# EAGLE board smd2dip (EAGLE 4.16)
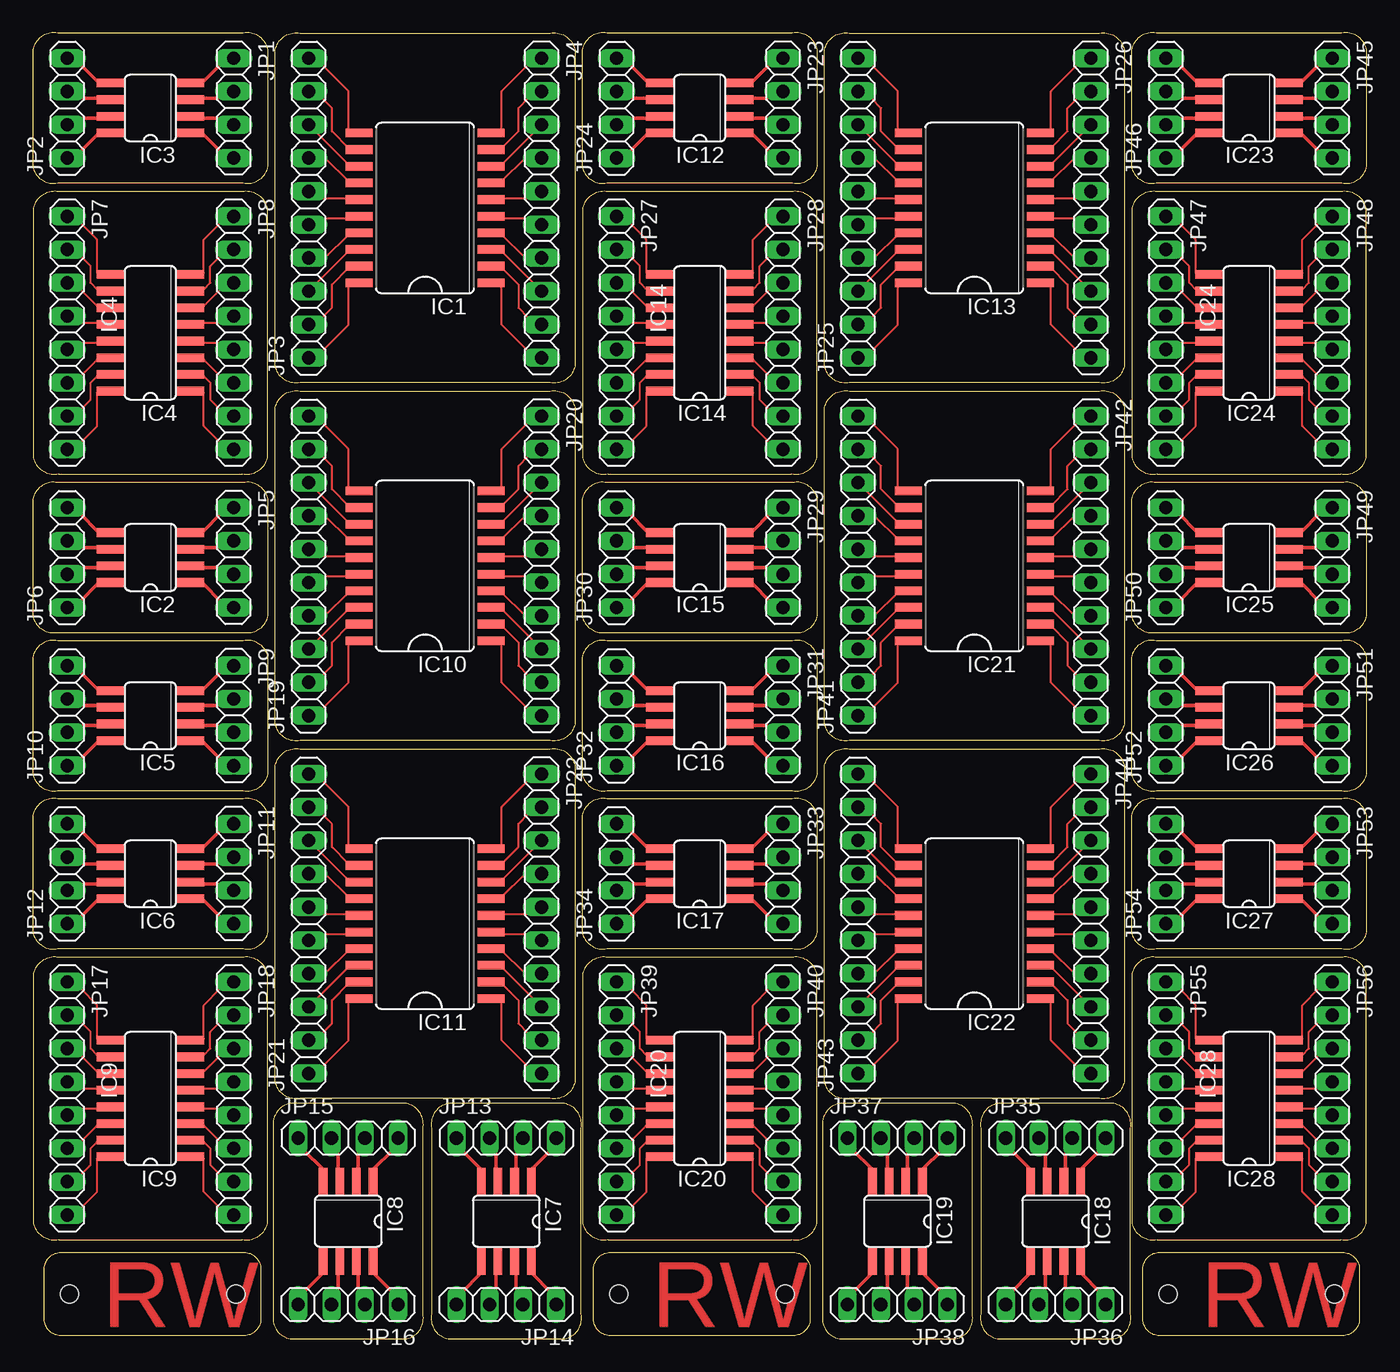
[diagram p0: board, top side]

Size 101.78 x 99.66 mm. Coordinates in mm from the lower left corner, seen from the top.
Outline: 0,89.47 arc90 1.9,88.2 16.05,88.2 arc90 17.96,89.47 17.96,98.35 arc90 16.05,99.62 1.9,99.62 arc90 0,98.35 0,89.47
Outline: 18.5,98.35 arc-90 20.41,99.62 39.46,99.62 arc-90 41.36,98.35 41.36,74.22 arc-90 39.46,72.95 20.41,72.95 arc-90 18.5,74.22 18.5,98.35
Outline: 0.09,86.29 arc-90 1.99,87.56 15.96,87.56 arc-90 17.87,86.29 17.87,67.24 arc-90 15.96,65.97 1.99,65.97 arc-90 0.09,67.24 0.09,86.29
Outline: 0,55.18 arc90 1.9,53.91 16.05,53.91 arc90 17.96,55.18 17.96,64.06 arc90 16.05,65.33 1.9,65.33 arc90 0,64.06 0,55.18
Outline: 0,43.11 arc90 1.9,41.84 16.05,41.84 arc90 17.96,43.11 17.96,51.99 arc90 16.05,53.26 1.9,53.26 arc90 0,51.99 0,43.11
Outline: 0,31.05 arc90 1.9,29.78 16.05,29.78 arc90 17.96,31.05 17.96,39.93 arc90 16.05,41.2 1.9,41.2 arc90 0,39.93 0,31.05
Outline: 40.57,0 arc90 41.84,1.9 41.84,16.05 arc90 40.57,17.96 31.69,17.96 arc90 30.42,16.05 30.42,1.9 arc90 31.69,0 40.57,0
Outline: 28.5,0 arc90 29.77,1.9 29.77,16.05 arc90 28.5,17.96 19.62,17.96 arc90 18.35,16.05 18.35,1.9 arc90 19.62,0 28.5,0
Outline: 0.09,27.87 arc-90 1.99,29.14 15.96,29.14 arc-90 17.87,27.87 17.87,8.82 arc-90 15.96,7.55 1.99,7.55 arc-90 0.09,8.82 0.09,27.87
Outline: 18.5,71.05 arc-90 20.41,72.32 39.46,72.32 arc-90 41.36,71.05 41.36,46.92 arc-90 39.46,45.65 20.41,45.65 arc-90 18.5,46.92 18.5,71.05
Outline: 18.5,43.74 arc-90 20.41,45.01 39.46,45.01 arc-90 41.36,43.74 41.36,19.61 arc-90 39.46,18.34 20.41,18.34 arc-90 18.5,19.61 18.5,43.74
Outline: 41.91,89.47 arc90 43.81,88.2 57.96,88.2 arc90 59.87,89.47 59.87,98.35 arc90 57.96,99.62 43.81,99.62 arc90 41.91,98.35 41.91,89.47
Outline: 60.41,98.35 arc-90 62.32,99.62 81.37,99.62 arc-90 83.27,98.35 83.27,74.22 arc-90 81.37,72.95 62.32,72.95 arc-90 60.41,74.22 60.41,98.35
Outline: 42,86.29 arc-90 43.9,87.56 57.87,87.56 arc-90 59.78,86.29 59.78,67.24 arc-90 57.87,65.97 43.9,65.97 arc-90 42,67.24 42,86.29
Outline: 41.91,55.18 arc90 43.81,53.91 57.96,53.91 arc90 59.87,55.18 59.87,64.06 arc90 57.96,65.33 43.81,65.33 arc90 41.91,64.06 41.91,55.18
Outline: 41.91,43.11 arc90 43.81,41.84 57.96,41.84 arc90 59.87,43.11 59.87,51.99 arc90 57.96,53.26 43.81,53.26 arc90 41.91,51.99 41.91,43.11
Outline: 41.91,31.05 arc90 43.81,29.78 57.96,29.78 arc90 59.87,31.05 59.87,39.93 arc90 57.96,41.2 43.81,41.2 arc90 41.91,39.93 41.91,31.05
Outline: 82.48,0 arc90 83.75,1.9 83.75,16.05 arc90 82.48,17.96 73.6,17.96 arc90 72.33,16.05 72.33,1.9 arc90 73.6,0 82.48,0
Outline: 70.41,0 arc90 71.68,1.9 71.68,16.05 arc90 70.41,17.96 61.53,17.96 arc90 60.26,16.05 60.26,1.9 arc90 61.53,0 70.41,0
Outline: 42,27.87 arc-90 43.9,29.14 57.87,29.14 arc-90 59.78,27.87 59.78,8.82 arc-90 57.87,7.55 43.9,7.55 arc-90 42,8.82 42,27.87
Outline: 60.41,71.05 arc-90 62.32,72.32 81.37,72.32 arc-90 83.27,71.05 83.27,46.92 arc-90 81.37,45.65 62.32,45.65 arc-90 60.41,46.92 60.41,71.05
Outline: 60.41,43.74 arc-90 62.32,45.01 81.37,45.01 arc-90 83.27,43.74 83.27,19.61 arc-90 81.37,18.34 62.32,18.34 arc-90 60.41,19.61 60.41,43.74
Outline: 83.82,89.47 arc90 85.73,88.2 99.87,88.2 arc90 101.78,89.47 101.78,98.35 arc90 99.87,99.62 85.73,99.62 arc90 83.82,98.35 83.82,89.47
Outline: 83.91,86.29 arc-90 85.81,87.56 99.78,87.56 arc-90 101.69,86.29 101.69,67.24 arc-90 99.78,65.97 85.81,65.97 arc-90 83.91,67.24 83.91,86.29
Outline: 83.82,55.18 arc90 85.73,53.91 99.87,53.91 arc90 101.78,55.18 101.78,64.06 arc90 99.87,65.33 85.73,65.33 arc90 83.82,64.06 83.82,55.18
Outline: 83.82,43.11 arc90 85.73,41.84 99.87,41.84 arc90 101.78,43.11 101.78,51.99 arc90 99.87,53.26 85.73,53.26 arc90 83.82,51.99 83.82,43.11
Outline: 83.82,31.05 arc90 85.73,29.78 99.87,29.78 arc90 101.78,31.05 101.78,39.93 arc90 99.87,41.2 85.73,41.2 arc90 83.82,39.93 83.82,31.05
Outline: 83.91,27.87 arc-90 85.81,29.14 99.78,29.14 arc-90 101.69,27.87 101.69,8.82 arc-90 99.78,7.55 85.81,7.55 arc-90 83.91,8.82 83.91,27.87
Outline: 0.88,5.33 arc-90 2.15,6.6 16.12,6.6 arc-90 17.39,5.33 17.39,1.52 arc-90 16.12,0.25 2.15,0.25 arc-90 0.88,1.52 0.88,5.33
Outline: 42.79,5.33 arc-90 44.06,6.6 58.03,6.6 arc-90 59.3,5.33 59.3,1.52 arc-90 58.03,0.25 44.06,0.25 arc-90 42.79,1.52 42.79,5.33
Outline: 84.7,5.33 arc-90 85.97,6.6 99.94,6.6 arc-90 101.21,5.33 101.21,1.52 arc-90 99.94,0.25 85.97,0.25 arc-90 84.7,1.52 84.7,5.33
Copper layers (1*16): Top 0.035mm / dielectric 1.5mm / Bottom 0.035mm
Design rules "PCB-POOL": minimum track width 6mil, minimum drill 12mil, track to track 6mil, track to pad 6mil, pad to pad 6mil, via to via 6mil, smd to smd 6mil, copper to edge 20mil, drill to drill 8mil, minimum pad ring 8mil, minimum via ring 6mil, stop-mask expansion 3mil, vias tented up to drill 0mil, thermal gap 8mil
Holes 1.4 mm at 2.79,3.42 15.49,3.42 44.7,3.42 57.4,3.42 86.61,3.42 99.31,3.42

## Footprints (pad centres in the part's own frame; a part is rotated, then mirrored left to right if it is on the bottom)
SO20W = smd 0.66 x 2.032: 1 -5.715,-5.029; 2 -4.445,-5.029; 3 -3.175,-5.029; 4 -1.905,-5.029; 5 -0.635,-5.029; 6 0.635,-5.029; 7 1.905,-5.029; 8 3.175,-5.029; 9 4.445,-5.029; 10 5.715,-5.029; 11 5.715,5.029; 12 4.445,5.029; 13 3.175,5.029; 14 1.905,5.029; 15 0.635,5.029; 16 -0.635,5.029; 17 -1.905,5.029; 18 -3.175,5.029; 19 -4.445,5.029; 20 -5.715,5.029
SO08 = smd 0.66 x 2.032: 1 -1.905,-3.073; 2 -0.635,-3.073; 3 0.635,-3.073; 4 1.905,-3.073; 5 1.905,3.073; 6 0.635,3.073; 7 -0.635,3.073; 8 -1.905,3.073
SO16 = smd 0.66 x 2.032: 1 -4.445,-3.073; 2 -3.175,-3.073; 3 -1.905,-3.073; 4 -0.635,-3.073; 5 0.635,-3.073; 6 1.905,-3.073; 7 3.175,-3.073; 8 4.445,-3.073; 9 4.445,3.073; 10 3.175,3.073; 11 1.905,3.073; 12 0.635,3.073; 13 -0.635,3.073; 14 -1.905,3.073; 15 -3.175,3.073; 16 -4.445,3.073
1X04 = drill 1.016 long: 1 -3.81,0; 2 -1.27,0; 3 1.27,0; 4 3.81,0
1X10 = drill 1.016 long: 1 -11.43,0; 2 -8.89,0; 3 -6.35,0; 4 -3.81,0; 5 -1.27,0; 6 1.27,0; 7 3.81,0; 8 6.35,0; 9 8.89,0; 10 11.43,0
1X08 = drill 1.016 long: 1 -8.89,0; 2 -6.35,0; 3 -3.81,0; 4 -1.27,0; 5 1.27,0; 6 3.81,0; 7 6.35,0; 8 8.89,0

## Placement (x,y rotation side)
IC1  74HCT573D  [SO20W]  29.93,86.29 90 top
IC2  MAX366CSA  [SO08]  8.98,59.62 90 top
IC3  MAX366CSA  [SO08]  8.98,93.91 90 top
IC4  MAX3232CSE  [SO16]  8.98,76.76 90 top
IC5  MAX366CSA  [SO08]  8.98,47.55 90 top
IC6  MAX366CSA  [SO08]  8.98,35.49 90 top
IC7  MAX366CSA  [SO08]  36.13,8.98 180 top
IC8  MAX366CSA  [SO08]  24.06,8.98 180 top
IC9  MAX3232CSE  [SO16]  8.98,18.34 90 top
IC10  74HCT573D  [SO20W]  29.93,58.98 90 top
IC11  74HCT573D  [SO20W]  29.93,31.68 90 top
IC12  MAX366CSA  [SO08]  50.89,93.91 90 top
IC13  74HCT573D  [SO20W]  71.84,86.29 90 top
IC14  MAX3232CSE  [SO16]  50.89,76.76 90 top
IC15  MAX366CSA  [SO08]  50.89,59.62 90 top
IC16  MAX366CSA  [SO08]  50.89,47.55 90 top
IC17  MAX366CSA  [SO08]  50.89,35.49 90 top
IC18  MAX366CSA  [SO08]  78.04,8.98 180 top
IC19  MAX366CSA  [SO08]  65.97,8.98 180 top
IC20  MAX3232CSE  [SO16]  50.89,18.34 90 top
IC21  74HCT573D  [SO20W]  71.84,58.98 90 top
IC22  74HCT573D  [SO20W]  71.84,31.68 90 top
IC23  MAX366CSA  [SO08]  92.8,93.91 90 top
IC24  MAX3232CSE  [SO16]  92.8,76.76 90 top
IC25  MAX366CSA  [SO08]  92.8,59.62 90 top
IC26  MAX366CSA  [SO08]  92.8,47.55 90 top
IC27  MAX366CSA  [SO08]  92.8,35.49 90 top
IC28  MAX3232CSE  [SO16]  92.8,18.34 90 top
JP1  [1X04]  15.33,93.91 270 top
JP2  [1X04]  2.63,93.91 90 top
JP3  [1X10]  21.04,86.29 90 top
JP4  [1X10]  38.82,86.29 270 top
JP5  [1X04]  15.33,59.62 270 top
JP6  [1X04]  2.63,59.62 90 top
JP7  [1X08]  2.63,76.76 270 top
JP8  [1X08]  15.33,76.76 270 top
JP9  [1X04]  15.33,47.55 270 top
JP10  [1X04]  2.63,47.55 90 top
JP11  [1X04]  15.33,35.49 270 top
JP12  [1X04]  2.63,35.49 90 top
JP13  [1X04]  36.13,15.33 0 top
JP14  [1X04]  36.13,2.63 180 top
JP15  [1X04]  24.06,15.33 0 top
JP16  [1X04]  24.06,2.63 180 top
JP17  [1X08]  2.63,18.34 270 top
JP18  [1X08]  15.33,18.34 270 top
JP19  [1X10]  21.04,58.98 90 top
JP20  [1X10]  38.82,58.98 270 top
JP21  [1X10]  21.04,31.68 90 top
JP22  [1X10]  38.82,31.68 270 top
JP23  [1X04]  57.24,93.91 270 top
JP24  [1X04]  44.54,93.91 90 top
JP25  [1X10]  62.95,86.29 90 top
JP26  [1X10]  80.73,86.29 270 top
JP27  [1X08]  44.54,76.76 270 top
JP28  [1X08]  57.24,76.76 270 top
JP29  [1X04]  57.24,59.62 270 top
JP30  [1X04]  44.54,59.62 90 top
JP31  [1X04]  57.24,47.55 270 top
JP32  [1X04]  44.54,47.55 90 top
JP33  [1X04]  57.24,35.49 270 top
JP34  [1X04]  44.54,35.49 90 top
JP35  [1X04]  78.04,15.33 0 top
JP36  [1X04]  78.04,2.63 180 top
JP37  [1X04]  65.97,15.33 0 top
JP38  [1X04]  65.97,2.63 180 top
JP39  [1X08]  44.54,18.34 270 top
JP40  [1X08]  57.24,18.34 270 top
JP41  [1X10]  62.95,58.98 90 top
JP42  [1X10]  80.73,58.98 270 top
JP43  [1X10]  62.95,31.68 90 top
JP44  [1X10]  80.73,31.68 270 top
JP45  [1X04]  99.15,93.91 270 top
JP46  [1X04]  86.45,93.91 90 top
JP47  [1X08]  86.45,76.76 270 top
JP48  [1X08]  99.15,76.76 270 top
JP49  [1X04]  99.15,59.62 270 top
JP50  [1X04]  86.45,59.62 90 top
JP51  [1X04]  99.15,47.55 270 top
JP52  [1X04]  86.45,47.55 90 top
JP53  [1X04]  99.15,35.49 270 top
JP54  [1X04]  86.45,35.49 90 top
JP55  [1X08]  86.45,18.34 270 top
JP56  [1X08]  99.15,18.34 270 top

## Library data of the parts
IC1 IC10 IC11 IC13 IC21 IC22 = 74xx-eu
IC2-IC9 IC12 IC14-IC20 IC23-IC28 = maxim
JP1-JP56 = pinhead

## Nets
N$1: IC3.1 JP1.4
N$2: IC3.2 JP1.3
N$3: IC3.3 JP1.2
N$4: IC3.4 JP1.1
N$5: IC3.5 JP2.4
N$6: IC3.6 JP2.3
N$7: IC3.7 JP2.2
N$8: IC3.8 JP2.1
N$9: IC4.1 JP8.8
N$10: IC4.3 JP8.6
N$11: IC4.2 JP8.7
N$12: IC4.4 JP8.5
N$13: IC4.5 JP8.4
N$14: IC4.6 JP8.3
N$15: IC4.7 JP8.2
N$16: IC4.8 JP8.1
N$17: IC4.16 JP7.8
N$18: IC4.15 JP7.7
N$19: IC4.14 JP7.6
N$20: IC4.13 JP7.5
N$21: IC4.12 JP7.4
N$22: IC4.11 JP7.3
N$23: IC4.10 JP7.2
N$24: IC4.9 JP7.1
N$25: IC1.2 JP4.9
N$26: IC1.3 JP4.8
N$27: IC1.4 JP4.7
N$28: IC1.5 JP4.6
N$29: IC1.6 JP4.5
N$30: IC1.7 JP4.4
N$31: IC1.8 JP4.3
N$32: IC1.9 JP4.2
N$33: IC1.10 JP4.1
N$34: IC1.1 JP4.10
N$35: IC1.11 JP3.10
N$36: IC1.12 JP3.9
N$37: IC1.13 JP3.8
N$38: IC1.14 JP3.7
N$39: IC1.15 JP3.6
N$40: IC1.16 JP3.5
N$41: IC1.17 JP3.4
N$42: IC1.18 JP3.3
N$43: IC1.19 JP3.2
N$44: IC1.20 JP3.1
N$45: IC2.1 JP5.4
N$46: IC2.2 JP5.3
N$47: IC2.3 JP5.2
N$48: IC2.4 JP5.1
N$49: IC2.5 JP6.4
N$50: IC2.6 JP6.3
N$51: IC2.7 JP6.2
N$52: IC2.8 JP6.1
N$53: IC5.1 JP9.4
N$54: IC5.2 JP9.3
N$55: IC5.3 JP9.2
N$56: IC5.4 JP9.1
N$57: IC5.5 JP10.4
N$58: IC5.6 JP10.3
N$59: IC5.7 JP10.2
N$60: IC5.8 JP10.1
N$61: IC6.1 JP11.4
N$62: IC6.2 JP11.3
N$63: IC6.3 JP11.2
N$64: IC6.4 JP11.1
N$65: IC6.5 JP12.4
N$66: IC6.6 JP12.3
N$67: IC6.7 JP12.2
N$68: IC6.8 JP12.1
N$69: IC7.1 JP13.4
N$70: IC7.2 JP13.3
N$71: IC7.3 JP13.2
N$72: IC7.4 JP13.1
N$73: IC7.5 JP14.4
N$74: IC7.6 JP14.3
N$75: IC7.7 JP14.2
N$76: IC7.8 JP14.1
N$77: IC8.1 JP15.4
N$78: IC8.2 JP15.3
N$79: IC8.3 JP15.2
N$80: IC8.4 JP15.1
N$81: IC8.5 JP16.4
N$82: IC8.6 JP16.3
N$83: IC8.7 JP16.2
N$84: IC8.8 JP16.1
N$85: IC9.1 JP18.8
N$86: IC9.3 JP18.6
N$87: IC9.2 JP18.7
N$88: IC9.4 JP18.5
N$89: IC9.5 JP18.4
N$90: IC9.6 JP18.3
N$91: IC9.7 JP18.2
N$92: IC9.8 JP18.1
N$93: IC9.16 JP17.8
N$94: IC9.15 JP17.7
N$95: IC9.14 JP17.6
N$96: IC9.13 JP17.5
N$97: IC9.12 JP17.4
N$98: IC9.11 JP17.3
N$99: IC9.10 JP17.2
N$100: IC9.9 JP17.1
N$101: IC10.2 JP20.9
N$102: IC10.3 JP20.8
N$103: IC10.4 JP20.7
N$104: IC10.5 JP20.6
N$105: IC10.6 JP20.5
N$106: IC10.7 JP20.4
N$107: IC10.8 JP20.3
N$108: IC10.9 JP20.2
N$109: IC10.10 JP20.1
N$110: IC10.1 JP20.10
N$111: IC10.11 JP19.10
N$112: IC10.12 JP19.9
N$113: IC10.13 JP19.8
N$114: IC10.14 JP19.7
N$115: IC10.15 JP19.6
N$116: IC10.16 JP19.5
N$117: IC10.17 JP19.4
N$118: IC10.18 JP19.3
N$119: IC10.19 JP19.2
N$120: IC10.20 JP19.1
N$121: IC11.2 JP22.9
N$122: IC11.3 JP22.8
N$123: IC11.4 JP22.7
N$124: IC11.5 JP22.6
N$125: IC11.6 JP22.5
N$126: IC11.7 JP22.4
N$127: IC11.8 JP22.3
N$128: IC11.9 JP22.2
N$129: IC11.10 JP22.1
N$130: IC11.1 JP22.10
N$131: IC11.11 JP21.10
N$132: IC11.12 JP21.9
N$133: IC11.13 JP21.8
N$134: IC11.14 JP21.7
N$135: IC11.15 JP21.6
N$136: IC11.16 JP21.5
N$137: IC11.17 JP21.4
N$138: IC11.18 JP21.3
N$139: IC11.19 JP21.2
N$140: IC11.20 JP21.1
N$141: IC12.1 JP23.4
N$142: IC12.2 JP23.3
N$143: IC12.3 JP23.2
N$144: IC12.4 JP23.1
N$145: IC12.5 JP24.4
N$146: IC12.6 JP24.3
N$147: IC12.7 JP24.2
N$148: IC12.8 JP24.1
N$149: IC14.1 JP28.8
N$150: IC14.3 JP28.6
N$151: IC14.2 JP28.7
N$152: IC14.4 JP28.5
N$153: IC14.5 JP28.4
N$154: IC14.6 JP28.3
N$155: IC14.7 JP28.2
N$156: IC14.8 JP28.1
N$157: IC14.16 JP27.8
N$158: IC14.15 JP27.7
N$159: IC14.14 JP27.6
N$160: IC14.13 JP27.5
N$161: IC14.12 JP27.4
N$162: IC14.11 JP27.3
N$163: IC14.10 JP27.2
N$164: IC14.9 JP27.1
N$165: IC13.2 JP26.9
N$166: IC13.3 JP26.8
N$167: IC13.4 JP26.7
N$168: IC13.5 JP26.6
N$169: IC13.6 JP26.5
N$170: IC13.7 JP26.4
N$171: IC13.8 JP26.3
N$172: IC13.9 JP26.2
N$173: IC13.10 JP26.1
N$174: IC13.1 JP26.10
N$175: IC13.11 JP25.10
N$176: IC13.12 JP25.9
N$177: IC13.13 JP25.8
N$178: IC13.14 JP25.7
N$179: IC13.15 JP25.6
N$180: IC13.16 JP25.5
N$181: IC13.17 JP25.4
N$182: IC13.18 JP25.3
N$183: IC13.19 JP25.2
N$184: IC13.20 JP25.1
N$185: IC15.1 JP29.4
N$186: IC15.2 JP29.3
N$187: IC15.3 JP29.2
N$188: IC15.4 JP29.1
N$189: IC15.5 JP30.4
N$190: IC15.6 JP30.3
N$191: IC15.7 JP30.2
N$192: IC15.8 JP30.1
N$193: IC16.1 JP31.4
N$194: IC16.2 JP31.3
N$195: IC16.3 JP31.2
N$196: IC16.4 JP31.1
N$197: IC16.5 JP32.4
N$198: IC16.6 JP32.3
N$199: IC16.7 JP32.2
N$200: IC16.8 JP32.1
N$201: IC17.1 JP33.4
N$202: IC17.2 JP33.3
N$203: IC17.3 JP33.2
N$204: IC17.4 JP33.1
N$205: IC17.5 JP34.4
N$206: IC17.6 JP34.3
N$207: IC17.7 JP34.2
N$208: IC17.8 JP34.1
N$209: IC18.1 JP35.4
N$210: IC18.2 JP35.3
N$211: IC18.3 JP35.2
N$212: IC18.4 JP35.1
N$213: IC18.5 JP36.4
N$214: IC18.6 JP36.3
N$215: IC18.7 JP36.2
N$216: IC18.8 JP36.1
N$217: IC19.1 JP37.4
N$218: IC19.2 JP37.3
N$219: IC19.3 JP37.2
N$220: IC19.4 JP37.1
N$221: IC19.5 JP38.4
N$222: IC19.6 JP38.3
N$223: IC19.7 JP38.2
N$224: IC19.8 JP38.1
N$225: IC20.1 JP40.8
N$226: IC20.3 JP40.6
N$227: IC20.2 JP40.7
N$228: IC20.4 JP40.5
N$229: IC20.5 JP40.4
N$230: IC20.6 JP40.3
N$231: IC20.7 JP40.2
N$232: IC20.8 JP40.1
N$233: IC20.16 JP39.8
N$234: IC20.15 JP39.7
N$235: IC20.14 JP39.6
N$236: IC20.13 JP39.5
N$237: IC20.12 JP39.4
N$238: IC20.11 JP39.3
N$239: IC20.10 JP39.2
N$240: IC20.9 JP39.1
N$241: IC21.2 JP42.9
N$242: IC21.3 JP42.8
N$243: IC21.4 JP42.7
N$244: IC21.5 JP42.6
N$245: IC21.6 JP42.5
N$246: IC21.7 JP42.4
N$247: IC21.8 JP42.3
N$248: IC21.9 JP42.2
N$249: IC21.10 JP42.1
N$250: IC21.1 JP42.10
N$251: IC21.11 JP41.10
N$252: IC21.12 JP41.9
N$253: IC21.13 JP41.8
N$254: IC21.14 JP41.7
N$255: IC21.15 JP41.6
N$256: IC21.16 JP41.5
N$257: IC21.17 JP41.4
N$258: IC21.18 JP41.3
N$259: IC21.19 JP41.2
N$260: IC21.20 JP41.1
N$261: IC22.2 JP44.9
N$262: IC22.3 JP44.8
N$263: IC22.4 JP44.7
N$264: IC22.5 JP44.6
N$265: IC22.6 JP44.5
N$266: IC22.7 JP44.4
N$267: IC22.8 JP44.3
N$268: IC22.9 JP44.2
N$269: IC22.10 JP44.1
N$270: IC22.1 JP44.10
N$271: IC22.11 JP43.10
N$272: IC22.12 JP43.9
N$273: IC22.13 JP43.8
N$274: IC22.14 JP43.7
N$275: IC22.15 JP43.6
N$276: IC22.16 JP43.5
N$277: IC22.17 JP43.4
N$278: IC22.18 JP43.3
N$279: IC22.19 JP43.2
N$280: IC22.20 JP43.1
N$281: IC23.1 JP45.4
N$282: IC23.2 JP45.3
N$283: IC23.3 JP45.2
N$284: IC23.4 JP45.1
N$285: IC23.5 JP46.4
N$286: IC23.6 JP46.3
N$287: IC23.7 JP46.2
N$288: IC23.8 JP46.1
N$289: IC24.1 JP48.8
N$290: IC24.3 JP48.6
N$291: IC24.2 JP48.7
N$292: IC24.4 JP48.5
N$293: IC24.5 JP48.4
N$294: IC24.6 JP48.3
N$295: IC24.7 JP48.2
N$296: IC24.8 JP48.1
N$297: IC24.16 JP47.8
N$298: IC24.15 JP47.7
N$299: IC24.14 JP47.6
N$300: IC24.13 JP47.5
N$301: IC24.12 JP47.4
N$302: IC24.11 JP47.3
N$303: IC24.10 JP47.2
N$304: IC24.9 JP47.1
N$305: IC25.1 JP49.4
N$306: IC25.2 JP49.3
N$307: IC25.3 JP49.2
N$308: IC25.4 JP49.1
N$309: IC25.5 JP50.4
N$310: IC25.6 JP50.3
N$311: IC25.7 JP50.2
N$312: IC25.8 JP50.1
N$313: IC26.1 JP51.4
N$314: IC26.2 JP51.3
N$315: IC26.3 JP51.2
N$316: IC26.4 JP51.1
N$317: IC26.5 JP52.4
N$318: IC26.6 JP52.3
N$319: IC26.7 JP52.2
N$320: IC26.8 JP52.1
N$321: IC27.1 JP53.4
N$322: IC27.2 JP53.3
N$323: IC27.3 JP53.2
N$324: IC27.4 JP53.1
N$325: IC27.5 JP54.4
N$326: IC27.6 JP54.3
N$327: IC27.7 JP54.2
N$328: IC27.8 JP54.1
N$329: IC28.1 JP56.8
N$330: IC28.3 JP56.6
N$331: IC28.2 JP56.7
N$332: IC28.4 JP56.5
N$333: IC28.5 JP56.4
N$334: IC28.6 JP56.3
N$335: IC28.7 JP56.2
N$336: IC28.8 JP56.1
N$337: IC28.16 JP55.8
N$338: IC28.15 JP55.7
N$339: IC28.14 JP55.6
N$340: IC28.13 JP55.5
N$341: IC28.12 JP55.4
N$342: IC28.11 JP55.3
N$343: IC28.10 JP55.2
N$344: IC28.9 JP55.1

## Tracks (layer width: path | path; a pad name or v marks a point on that pad's centre or on a via)
N$1
  Top 0.254: IC3.1 13.04,91.88 14.31,90.61 JP1.4
N$2
  Top 0.254: IC3.2 13.04,93.15 14.06,93.15 JP1.3
N$3
  Top 0.254: IC3.3 13.04,94.67 14.06,94.67 JP1.2
N$4
  Top 0.254: IC3.4 13.04,95.94 14.31,97.21 JP1.1
N$5
  Top 0.254: IC3.5 4.92,95.94 3.64,97.21 JP2.4
N$6
  Top 0.254: IC3.6 4.92,94.67 3.9,94.67 JP2.3
N$7
  Top 0.254: IC3.7 4.92,93.15 3.9,93.15 JP2.2
N$8
  Top 0.254: IC3.8 4.92,91.88 3.64,90.61 JP2.1
N$9
  Top 0.152: IC4.1 13.04,72.19 13.04,69.65 14.31,68.38 JP8.8
N$10
  Top 0.152: IC4.3 13.04,74.73 14.31,73.46 JP8.6
N$11
  Top 0.152: IC4.2 13.04,73.46 13.55,72.95 13.55,71.68 14.31,70.92 JP8.7
N$12
  Top 0.152: IC4.4 13.04,76 14.31,76 JP8.5
N$13
  Top 0.152: IC4.5 13.04,77.53 14.31,77.53 JP8.4
N$14
  Top 0.152: IC4.6 13.04,78.8 14.31,80.07 JP8.3
N$15
  Top 0.152: IC4.7 13.04,80.07 13.55,80.57 13.55,81.84 14.31,82.61 JP8.2
N$16
  Top 0.152: IC4.8 13.04,81.34 13.04,83.88 14.31,85.15 JP8.1
N$17
  Top 0.152: IC4.16 4.92,72.19 4.92,69.65 3.64,68.38 JP7.8
N$18
  Top 0.152: IC4.15 4.92,73.46 4.41,72.95 4.41,71.68 3.64,70.92 JP7.7
N$19
  Top 0.152: IC4.14 4.92,74.73 3.64,73.46 JP7.6
N$20
  Top 0.152: IC4.13 4.92,76 3.64,76 JP7.5
N$21
  Top 0.152: IC4.12 4.92,77.53 3.64,77.53 JP7.4
N$22
  Top 0.152: IC4.11 4.92,78.8 3.64,80.07 JP7.3
N$23
  Top 0.152: IC4.10 4.92,80.07 4.41,80.57 4.41,81.84 3.64,82.61 JP7.2
N$24
  Top 0.152: IC4.9 4.92,81.34 4.92,83.88 3.64,85.15 JP7.1
N$25
  Top 0.152: IC1.2 35.78,81.72 37.05,80.45 37.05,78.67 37.81,77.91 JP4.9
N$26
  Top 0.152: IC1.3 35.78,82.99 JP4.8
N$27
  Top 0.152: IC1.4 35.78,84.26 37.55,82.48 JP4.7
N$28
  Top 0.152: IC1.5 35.78,85.53 37.81,85.53 JP4.6
N$29
  Top 0.152: IC1.6 35.78,87.05 37.81,87.05 JP4.5
N$30
  Top 0.152: IC1.7 35.78,88.32 37.55,90.1 JP4.4
N$31
  Top 0.152: IC1.8 35.78,89.59 JP4.3
N$32
  Top 0.152: IC1.9 35.78,90.86 37.05,92.13 37.05,93.91 37.81,94.67 JP4.2
N$33
  Top 0.152: IC1.10 35.78,92.13 35.78,95.18 37.81,97.21 JP4.1
N$34
  Top 0.152: IC1.1 35.78,80.45 35.78,77.4 37.81,75.37 JP4.10
N$35
  Top 0.152: IC1.11 24.09,92.13 24.09,95.18 22.06,97.21 JP3.10
N$36
  Top 0.152: IC1.12 24.09,90.86 22.82,92.13 22.82,93.91 22.06,94.67 JP3.9
N$37
  Top 0.152: IC1.13 24.09,89.59 JP3.8
N$38
  Top 0.152: IC1.14 24.09,88.32 22.31,90.1 JP3.7
N$39
  Top 0.152: IC1.15 24.09,87.05 22.06,87.05 JP3.6
N$40
  Top 0.152: IC1.16 24.09,85.53 22.06,85.53 JP3.5
N$41
  Top 0.152: IC1.17 24.09,84.26 22.31,82.48 JP3.4
N$42
  Top 0.152: IC1.18 24.09,82.99 JP3.3
N$43
  Top 0.152: IC1.19 24.09,81.72 22.82,80.45 22.82,78.67 22.06,77.91 JP3.2
N$44
  Top 0.152: IC1.20 24.09,80.45 24.09,77.4 22.06,75.37 JP3.1
N$45
  Top 0.254: IC2.1 13.04,57.59 14.31,56.32 JP5.4
N$46
  Top 0.254: IC2.2 13.04,58.86 14.06,58.86 JP5.3
N$47
  Top 0.254: IC2.3 13.04,60.38 14.06,60.38 JP5.2
N$48
  Top 0.254: IC2.4 13.04,61.65 14.31,62.92 JP5.1
N$49
  Top 0.254: IC2.5 4.92,61.65 3.64,62.92 JP6.4
N$50
  Top 0.254: IC2.6 4.92,60.38 3.9,60.38 JP6.3
N$51
  Top 0.254: IC2.7 4.92,58.86 3.9,58.86 JP6.2
N$52
  Top 0.254: IC2.8 4.92,57.59 3.64,56.32 JP6.1
N$53
  Top 0.254: IC5.1 13.04,45.52 14.31,44.25 JP9.4
N$54
  Top 0.254: IC5.2 13.04,46.79 14.06,46.79 JP9.3
N$55
  Top 0.254: IC5.3 13.04,48.32 14.06,48.32 JP9.2
N$56
  Top 0.254: IC5.4 13.04,49.59 14.31,50.86 JP9.1
N$57
  Top 0.254: IC5.5 4.92,49.59 3.64,50.86 JP10.4
N$58
  Top 0.254: IC5.6 4.92,48.32 3.9,48.32 JP10.3
N$59
  Top 0.254: IC5.7 4.92,46.79 3.9,46.79 JP10.2
N$60
  Top 0.254: IC5.8 4.92,45.52 3.64,44.25 JP10.1
N$61
  Top 0.254: IC6.1 13.04,33.46 14.31,32.19 JP11.4
N$62
  Top 0.254: IC6.2 13.04,34.73 14.06,34.73 JP11.3
N$63
  Top 0.254: IC6.3 13.04,36.25 14.06,36.25 JP11.2
N$64
  Top 0.254: IC6.4 13.04,37.52 14.31,38.79 JP11.1
N$65
  Top 0.254: IC6.5 4.92,37.52 3.64,38.79 JP12.4
N$66
  Top 0.254: IC6.6 4.92,36.25 3.9,36.25 JP12.3
N$67
  Top 0.254: IC6.7 4.92,34.73 3.9,34.73 JP12.2
N$68
  Top 0.254: IC6.8 4.92,33.46 3.64,32.19 JP12.1
N$69
  Top 0.254: IC7.1 38.16,13.04 39.43,14.31 JP13.4
N$70
  Top 0.254: IC7.2 36.89,13.04 36.89,14.06 JP13.3
N$71
  Top 0.254: IC7.3 35.37,13.04 35.37,14.06 JP13.2
N$72
  Top 0.254: IC7.4 34.1,13.04 32.83,14.31 JP13.1
N$73
  Top 0.254: IC7.5 34.1,4.92 32.83,3.65 JP14.4
N$74
  Top 0.254: IC7.6 35.37,4.92 35.37,3.9 JP14.3
N$75
  Top 0.254: IC7.7 36.89,4.92 36.89,3.9 JP14.2
N$76
  Top 0.254: IC7.8 38.16,4.92 39.43,3.65 JP14.1
N$77
  Top 0.254: IC8.1 26.1,13.04 27.37,14.31 JP15.4
N$78
  Top 0.254: IC8.2 24.83,13.04 24.83,14.06 JP15.3
N$79
  Top 0.254: IC8.3 23.3,13.04 23.3,14.06 JP15.2
N$80
  Top 0.254: IC8.4 22.03,13.04 20.76,14.31 JP15.1
N$81
  Top 0.254: IC8.5 22.03,4.92 20.76,3.65 JP16.4
N$82
  Top 0.254: IC8.6 23.3,4.92 23.3,3.9 JP16.3
N$83
  Top 0.254: IC8.7 24.83,4.92 24.83,3.9 JP16.2
N$84
  Top 0.254: IC8.8 26.1,4.92 27.37,3.65 JP16.1
N$85
  Top 0.152: IC9.1 13.04,13.77 13.04,11.23 14.31,9.96 JP18.8
N$86
  Top 0.152: IC9.3 13.04,16.31 14.31,15.04 JP18.6
N$87
  Top 0.152: IC9.2 13.04,15.04 13.55,14.53 13.55,13.26 14.31,12.5 JP18.7
N$88
  Top 0.152: IC9.4 13.04,17.58 14.31,17.58 JP18.5
N$89
  Top 0.152: IC9.5 13.04,19.11 14.31,19.11 JP18.4
N$90
  Top 0.152: IC9.6 13.04,20.38 14.31,21.65 JP18.3
N$91
  Top 0.152: IC9.7 13.04,21.65 13.55,22.15 13.55,23.42 14.31,24.19 JP18.2
N$92
  Top 0.152: IC9.8 13.04,22.92 13.04,25.46 14.31,26.73 JP18.1
N$93
  Top 0.152: IC9.16 4.92,13.77 4.92,11.23 3.64,9.96 JP17.8
N$94
  Top 0.152: IC9.15 4.92,15.04 4.41,14.53 4.41,13.26 3.64,12.5 JP17.7
N$95
  Top 0.152: IC9.14 4.92,16.31 3.64,15.04 JP17.6
N$96
  Top 0.152: IC9.13 4.92,17.58 3.64,17.58 JP17.5
N$97
  Top 0.152: IC9.12 4.92,19.11 3.64,19.11 JP17.4
N$98
  Top 0.152: IC9.11 4.92,20.38 3.64,21.65 JP17.3
N$99
  Top 0.152: IC9.10 4.92,21.65 4.41,22.15 4.41,23.42 3.64,24.19 JP17.2
N$100
  Top 0.152: IC9.9 4.92,22.92 4.92,25.46 3.64,26.73 JP17.1
N$101
  Top 0.152: IC10.2 35.78,54.41 37.05,53.14 37.05,51.36 37.81,50.6 JP20.9
N$102
  Top 0.152: IC10.3 35.78,55.68 JP20.8
N$103
  Top 0.152: IC10.4 35.78,56.95 37.55,55.17 JP20.7
N$104
  Top 0.152: IC10.5 35.78,58.22 37.81,58.22 JP20.6
N$105
  Top 0.152: IC10.6 35.78,59.75 37.81,59.75 JP20.5
N$106
  Top 0.152: IC10.7 35.78,61.02 37.55,62.79 JP20.4
N$107
  Top 0.152: IC10.8 35.78,62.29 JP20.3
N$108
  Top 0.152: IC10.9 35.78,63.56 37.05,64.83 37.05,66.6 37.81,67.37 JP20.2
N$109
  Top 0.152: IC10.10 35.78,64.83 35.78,67.87 37.81,69.91 JP20.1
N$110
  Top 0.152: IC10.1 35.78,53.14 35.78,50.09 37.81,48.06 JP20.10
N$111
  Top 0.152: IC10.11 24.09,64.83 24.09,67.87 22.06,69.91 JP19.10
N$112
  Top 0.152: IC10.12 24.09,63.56 22.82,64.83 22.82,66.6 22.06,67.37 JP19.9
N$113
  Top 0.152: IC10.13 24.09,62.29 JP19.8
N$114
  Top 0.152: IC10.14 24.09,61.02 22.31,62.79 JP19.7
N$115
  Top 0.152: IC10.15 24.09,59.75 22.06,59.75 JP19.6
N$116
  Top 0.152: IC10.16 24.09,58.22 22.06,58.22 JP19.5
N$117
  Top 0.152: IC10.17 24.09,56.95 22.31,55.17 JP19.4
N$118
  Top 0.152: IC10.18 24.09,55.68 JP19.3
N$119
  Top 0.152: IC10.19 24.09,54.41 22.82,53.14 22.82,51.36 22.06,50.6 JP19.2
N$120
  Top 0.152: IC10.20 24.09,53.14 24.09,50.09 22.06,48.06 JP19.1
N$121
  Top 0.152: IC11.2 35.78,27.11 37.05,25.84 37.05,24.06 37.81,23.3 JP22.9
N$122
  Top 0.152: IC11.3 35.78,28.38 JP22.8
N$123
  Top 0.152: IC11.4 35.78,29.65 37.55,27.87 JP22.7
N$124
  Top 0.152: IC11.5 35.78,30.92 37.81,30.92 JP22.6
N$125
  Top 0.152: IC11.6 35.78,32.44 37.81,32.44 JP22.5
N$126
  Top 0.152: IC11.7 35.78,33.71 37.55,35.49 JP22.4
N$127
  Top 0.152: IC11.8 35.78,34.98 JP22.3
N$128
  Top 0.152: IC11.9 35.78,36.25 37.05,37.52 37.05,39.3 37.81,40.06 JP22.2
N$129
  Top 0.152: IC11.10 35.78,37.52 35.78,40.57 37.81,42.6 JP22.1
N$130
  Top 0.152: IC11.1 35.78,25.84 35.78,22.79 37.81,20.76 JP22.10
N$131
  Top 0.152: IC11.11 24.09,37.52 24.09,40.57 22.06,42.6 JP21.10
N$132
  Top 0.152: IC11.12 24.09,36.25 22.82,37.52 22.82,39.3 22.06,40.06 JP21.9
N$133
  Top 0.152: IC11.13 24.09,34.98 JP21.8
N$134
  Top 0.152: IC11.14 24.09,33.71 22.31,35.49 JP21.7
N$135
  Top 0.152: IC11.15 24.09,32.44 22.06,32.44 JP21.6
N$136
  Top 0.152: IC11.16 24.09,30.92 22.06,30.92 JP21.5
N$137
  Top 0.152: IC11.17 24.09,29.65 22.31,27.87 JP21.4
N$138
  Top 0.152: IC11.18 24.09,28.38 JP21.3
N$139
  Top 0.152: IC11.19 24.09,27.11 22.82,25.84 22.82,24.06 22.06,23.3 JP21.2
N$140
  Top 0.152: IC11.20 24.09,25.84 24.09,22.79 22.06,20.76 JP21.1
N$141
  Top 0.254: IC12.1 54.95,91.88 56.22,90.61 JP23.4
N$142
  Top 0.254: IC12.2 54.95,93.15 55.97,93.15 JP23.3
N$143
  Top 0.254: IC12.3 54.95,94.67 55.97,94.67 JP23.2
N$144
  Top 0.254: IC12.4 54.95,95.94 56.22,97.21 JP23.1
N$145
  Top 0.254: IC12.5 46.82,95.94 45.55,97.21 JP24.4
N$146
  Top 0.254: IC12.6 46.82,94.67 45.81,94.67 JP24.3
N$147
  Top 0.254: IC12.7 46.82,93.15 45.81,93.15 JP24.2
N$148
  Top 0.254: IC12.8 46.82,91.88 45.55,90.61 JP24.1
N$149
  Top 0.152: IC14.1 54.95,72.19 54.95,69.65 56.22,68.38 JP28.8
N$150
  Top 0.152: IC14.3 54.95,74.73 56.22,73.46 JP28.6
N$151
  Top 0.152: IC14.2 54.95,73.46 55.46,72.95 55.46,71.68 56.22,70.92 JP28.7
N$152
  Top 0.152: IC14.4 54.95,76 56.22,76 JP28.5
N$153
  Top 0.152: IC14.5 54.95,77.53 56.22,77.53 JP28.4
N$154
  Top 0.152: IC14.6 54.95,78.8 56.22,80.07 JP28.3
N$155
  Top 0.152: IC14.7 54.95,80.07 55.46,80.57 55.46,81.84 56.22,82.61 JP28.2
N$156
  Top 0.152: IC14.8 54.95,81.34 54.95,83.88 56.22,85.15 JP28.1
N$157
  Top 0.152: IC14.16 46.82,72.19 46.82,69.65 45.55,68.38 JP27.8
N$158
  Top 0.152: IC14.15 46.82,73.46 46.32,72.95 46.32,71.68 45.55,70.92 JP27.7
N$159
  Top 0.152: IC14.14 46.82,74.73 45.55,73.46 JP27.6
N$160
  Top 0.152: IC14.13 46.82,76 45.55,76 JP27.5
N$161
  Top 0.152: IC14.12 46.82,77.53 45.55,77.53 JP27.4
N$162
  Top 0.152: IC14.11 46.82,78.8 45.55,80.07 JP27.3
N$163
  Top 0.152: IC14.10 46.82,80.07 46.32,80.57 46.32,81.84 45.55,82.61 JP27.2
N$164
  Top 0.152: IC14.9 46.82,81.34 46.82,83.88 45.55,85.15 JP27.1
N$165
  Top 0.152: IC13.2 77.69,81.72 78.96,80.45 78.96,78.67 79.72,77.91 JP26.9
N$166
  Top 0.152: IC13.3 77.69,82.99 JP26.8
N$167
  Top 0.152: IC13.4 77.69,84.26 79.46,82.48 JP26.7
N$168
  Top 0.152: IC13.5 77.69,85.53 79.72,85.53 JP26.6
N$169
  Top 0.152: IC13.6 77.69,87.05 79.72,87.05 JP26.5
N$170
  Top 0.152: IC13.7 77.69,88.32 79.46,90.1 JP26.4
N$171
  Top 0.152: IC13.8 77.69,89.59 JP26.3
N$172
  Top 0.152: IC13.9 77.69,90.86 78.96,92.13 78.96,93.91 79.72,94.67 JP26.2
N$173
  Top 0.152: IC13.10 77.69,92.13 77.69,95.18 79.72,97.21 JP26.1
N$174
  Top 0.152: IC13.1 77.69,80.45 77.69,77.4 79.72,75.37 JP26.10
N$175
  Top 0.152: IC13.11 66,92.13 66,95.18 63.97,97.21 JP25.10
N$176
  Top 0.152: IC13.12 66,90.86 64.73,92.13 64.73,93.91 63.97,94.67 JP25.9
N$177
  Top 0.152: IC13.13 66,89.59 JP25.8
N$178
  Top 0.152: IC13.14 66,88.32 64.22,90.1 JP25.7
N$179
  Top 0.152: IC13.15 66,87.05 63.97,87.05 JP25.6
N$180
  Top 0.152: IC13.16 66,85.53 63.97,85.53 JP25.5
N$181
  Top 0.152: IC13.17 66,84.26 64.22,82.48 JP25.4
N$182
  Top 0.152: IC13.18 66,82.99 JP25.3
N$183
  Top 0.152: IC13.19 66,81.72 64.73,80.45 64.73,78.67 63.97,77.91 JP25.2
N$184
  Top 0.152: IC13.20 66,80.45 66,77.4 63.97,75.37 JP25.1
N$185
  Top 0.254: IC15.1 54.95,57.59 56.22,56.32 JP29.4
N$186
  Top 0.254: IC15.2 54.95,58.86 55.97,58.86 JP29.3
N$187
  Top 0.254: IC15.3 54.95,60.38 55.97,60.38 JP29.2
N$188
  Top 0.254: IC15.4 54.95,61.65 56.22,62.92 JP29.1
N$189
  Top 0.254: IC15.5 46.82,61.65 45.55,62.92 JP30.4
N$190
  Top 0.254: IC15.6 46.82,60.38 45.81,60.38 JP30.3
N$191
  Top 0.254: IC15.7 46.82,58.86 45.81,58.86 JP30.2
N$192
  Top 0.254: IC15.8 46.82,57.59 45.55,56.32 JP30.1
N$193
  Top 0.254: IC16.1 54.95,45.52 56.22,44.25 JP31.4
N$194
  Top 0.254: IC16.2 54.95,46.79 55.97,46.79 JP31.3
N$195
  Top 0.254: IC16.3 54.95,48.32 55.97,48.32 JP31.2
N$196
  Top 0.254: IC16.4 54.95,49.59 56.22,50.86 JP31.1
N$197
  Top 0.254: IC16.5 46.82,49.59 45.55,50.86 JP32.4
N$198
  Top 0.254: IC16.6 46.82,48.32 45.81,48.32 JP32.3
N$199
  Top 0.254: IC16.7 46.82,46.79 45.81,46.79 JP32.2
N$200
  Top 0.254: IC16.8 46.82,45.52 45.55,44.25 JP32.1
N$201
  Top 0.254: IC17.1 54.95,33.46 56.22,32.19 JP33.4
N$202
  Top 0.254: IC17.2 54.95,34.73 55.97,34.73 JP33.3
N$203
  Top 0.254: IC17.3 54.95,36.25 55.97,36.25 JP33.2
N$204
  Top 0.254: IC17.4 54.95,37.52 56.22,38.79 JP33.1
N$205
  Top 0.254: IC17.5 46.82,37.52 45.55,38.79 JP34.4
N$206
  Top 0.254: IC17.6 46.82,36.25 45.81,36.25 JP34.3
N$207
  Top 0.254: IC17.7 46.82,34.73 45.81,34.73 JP34.2
N$208
  Top 0.254: IC17.8 46.82,33.46 45.55,32.19 JP34.1
N$209
  Top 0.254: IC18.1 80.07,13.04 81.34,14.31 JP35.4
N$210
  Top 0.254: IC18.2 78.8,13.04 78.8,14.06 JP35.3
N$211
  Top 0.254: IC18.3 77.28,13.04 77.28,14.06 JP35.2
N$212
  Top 0.254: IC18.4 76.01,13.04 74.74,14.31 JP35.1
N$213
  Top 0.254: IC18.5 76.01,4.92 74.74,3.65 JP36.4
N$214
  Top 0.254: IC18.6 77.28,4.92 77.28,3.9 JP36.3
N$215
  Top 0.254: IC18.7 78.8,4.92 78.8,3.9 JP36.2
N$216
  Top 0.254: IC18.8 80.07,4.92 81.34,3.65 JP36.1
N$217
  Top 0.254: IC19.1 68.01,13.04 69.28,14.31 JP37.4
N$218
  Top 0.254: IC19.2 66.74,13.04 66.74,14.06 JP37.3
N$219
  Top 0.254: IC19.3 65.21,13.04 65.21,14.06 JP37.2
N$220
  Top 0.254: IC19.4 63.94,13.04 62.67,14.31 JP37.1
N$221
  Top 0.254: IC19.5 63.94,4.92 62.67,3.65 JP38.4
N$222
  Top 0.254: IC19.6 65.21,4.92 65.21,3.9 JP38.3
N$223
  Top 0.254: IC19.7 66.74,4.92 66.74,3.9 JP38.2
N$224
  Top 0.254: IC19.8 68.01,4.92 69.28,3.65 JP38.1
N$225
  Top 0.152: IC20.1 54.95,13.77 54.95,11.23 56.22,9.96 JP40.8
N$226
  Top 0.152: IC20.3 54.95,16.31 56.22,15.04 JP40.6
N$227
  Top 0.152: IC20.2 54.95,15.04 55.46,14.53 55.46,13.26 56.22,12.5 JP40.7
N$228
  Top 0.152: IC20.4 54.95,17.58 56.22,17.58 JP40.5
N$229
  Top 0.152: IC20.5 54.95,19.11 56.22,19.11 JP40.4
N$230
  Top 0.152: IC20.6 54.95,20.38 56.22,21.65 JP40.3
N$231
  Top 0.152: IC20.7 54.95,21.65 55.46,22.15 55.46,23.42 56.22,24.19 JP40.2
N$232
  Top 0.152: IC20.8 54.95,22.92 54.95,25.46 56.22,26.73 JP40.1
N$233
  Top 0.152: IC20.16 46.82,13.77 46.82,11.23 45.55,9.96 JP39.8
N$234
  Top 0.152: IC20.15 46.82,15.04 46.32,14.53 46.32,13.26 45.55,12.5 JP39.7
N$235
  Top 0.152: IC20.14 46.82,16.31 45.55,15.04 JP39.6
N$236
  Top 0.152: IC20.13 46.82,17.58 45.55,17.58 JP39.5
N$237
  Top 0.152: IC20.12 46.82,19.11 45.55,19.11 JP39.4
N$238
  Top 0.152: IC20.11 46.82,20.38 45.55,21.65 JP39.3
N$239
  Top 0.152: IC20.10 46.82,21.65 46.32,22.15 46.32,23.42 45.55,24.19 JP39.2
N$240
  Top 0.152: IC20.9 46.82,22.92 46.82,25.46 45.55,26.73 JP39.1
N$241
  Top 0.152: IC21.2 77.69,54.41 78.96,53.14 78.96,51.36 79.72,50.6 JP42.9
N$242
  Top 0.152: IC21.3 77.69,55.68 JP42.8
N$243
  Top 0.152: IC21.4 77.69,56.95 79.46,55.17 JP42.7
N$244
  Top 0.152: IC21.5 77.69,58.22 79.72,58.22 JP42.6
N$245
  Top 0.152: IC21.6 77.69,59.75 79.72,59.75 JP42.5
N$246
  Top 0.152: IC21.7 77.69,61.02 79.46,62.79 JP42.4
N$247
  Top 0.152: IC21.8 77.69,62.29 JP42.3
N$248
  Top 0.152: IC21.9 77.69,63.56 78.96,64.83 78.96,66.6 79.72,67.37 JP42.2
N$249
  Top 0.152: IC21.10 77.69,64.83 77.69,67.87 79.72,69.91 JP42.1
N$250
  Top 0.152: IC21.1 77.69,53.14 77.69,50.09 79.72,48.06 JP42.10
N$251
  Top 0.152: IC21.11 66,64.83 66,67.87 63.97,69.91 JP41.10
N$252
  Top 0.152: IC21.12 66,63.56 64.73,64.83 64.73,66.6 63.97,67.37 JP41.9
N$253
  Top 0.152: IC21.13 66,62.29 JP41.8
N$254
  Top 0.152: IC21.14 66,61.02 64.22,62.79 JP41.7
N$255
  Top 0.152: IC21.15 66,59.75 63.97,59.75 JP41.6
N$256
  Top 0.152: IC21.16 66,58.22 63.97,58.22 JP41.5
N$257
  Top 0.152: IC21.17 66,56.95 64.22,55.17 JP41.4
N$258
  Top 0.152: IC21.18 66,55.68 JP41.3
N$259
  Top 0.152: IC21.19 66,54.41 64.73,53.14 64.73,51.36 63.97,50.6 JP41.2
N$260
  Top 0.152: IC21.20 66,53.14 66,50.09 63.97,48.06 JP41.1
N$261
  Top 0.152: IC22.2 77.69,27.11 78.96,25.84 78.96,24.06 79.72,23.3 JP44.9
N$262
  Top 0.152: IC22.3 77.69,28.38 JP44.8
N$263
  Top 0.152: IC22.4 77.69,29.65 79.46,27.87 JP44.7
N$264
  Top 0.152: IC22.5 77.69,30.92 79.72,30.92 JP44.6
N$265
  Top 0.152: IC22.6 77.69,32.44 79.72,32.44 JP44.5
N$266
  Top 0.152: IC22.7 77.69,33.71 79.46,35.49 JP44.4
N$267
  Top 0.152: IC22.8 77.69,34.98 JP44.3
N$268
  Top 0.152: IC22.9 77.69,36.25 78.96,37.52 78.96,39.3 79.72,40.06 JP44.2
N$269
  Top 0.152: IC22.10 77.69,37.52 77.69,40.57 79.72,42.6 JP44.1
N$270
  Top 0.152: IC22.1 77.69,25.84 77.69,22.79 79.72,20.76 JP44.10
N$271
  Top 0.152: IC22.11 66,37.52 66,40.57 63.97,42.6 JP43.10
N$272
  Top 0.152: IC22.12 66,36.25 64.73,37.52 64.73,39.3 63.97,40.06 JP43.9
N$273
  Top 0.152: IC22.13 66,34.98 JP43.8
N$274
  Top 0.152: IC22.14 66,33.71 64.22,35.49 JP43.7
N$275
  Top 0.152: IC22.15 66,32.44 63.97,32.44 JP43.6
N$276
  Top 0.152: IC22.16 66,30.92 63.97,30.92 JP43.5
N$277
  Top 0.152: IC22.17 66,29.65 64.22,27.87 JP43.4
N$278
  Top 0.152: IC22.18 66,28.38 JP43.3
N$279
  Top 0.152: IC22.19 66,27.11 64.73,25.84 64.73,24.06 63.97,23.3 JP43.2
N$280
  Top 0.152: IC22.20 66,25.84 66,22.79 63.97,20.76 JP43.1
N$281
  Top 0.254: IC23.1 96.86,91.88 98.13,90.61 JP45.4
N$282
  Top 0.254: IC23.2 96.86,93.15 97.88,93.15 JP45.3
N$283
  Top 0.254: IC23.3 96.86,94.67 97.88,94.67 JP45.2
N$284
  Top 0.254: IC23.4 96.86,95.94 98.13,97.21 JP45.1
N$285
  Top 0.254: IC23.5 88.73,95.94 87.47,97.21 JP46.4
N$286
  Top 0.254: IC23.6 88.73,94.67 87.72,94.67 JP46.3
N$287
  Top 0.254: IC23.7 88.73,93.15 87.72,93.15 JP46.2
N$288
  Top 0.254: IC23.8 88.73,91.88 87.47,90.61 JP46.1
N$289
  Top 0.152: IC24.1 96.86,72.19 96.86,69.65 98.13,68.38 JP48.8
N$290
  Top 0.152: IC24.3 96.86,74.73 98.13,73.46 JP48.6
N$291
  Top 0.152: IC24.2 96.86,73.46 97.37,72.95 97.37,71.68 98.13,70.92 JP48.7
N$292
  Top 0.152: IC24.4 96.86,76 98.13,76 JP48.5
N$293
  Top 0.152: IC24.5 96.86,77.53 98.13,77.53 JP48.4
N$294
  Top 0.152: IC24.6 96.86,78.8 98.13,80.07 JP48.3
N$295
  Top 0.152: IC24.7 96.86,80.07 97.37,80.57 97.37,81.84 98.13,82.61 JP48.2
N$296
  Top 0.152: IC24.8 96.86,81.34 96.86,83.88 98.13,85.15 JP48.1
N$297
  Top 0.152: IC24.16 88.73,72.19 88.73,69.65 87.47,68.38 JP47.8
N$298
  Top 0.152: IC24.15 88.73,73.46 88.23,72.95 88.23,71.68 87.47,70.92 JP47.7
N$299
  Top 0.152: IC24.14 88.73,74.73 87.47,73.46 JP47.6
N$300
  Top 0.152: IC24.13 88.73,76 87.47,76 JP47.5
N$301
  Top 0.152: IC24.12 88.73,77.53 87.47,77.53 JP47.4
N$302
  Top 0.152: IC24.11 88.73,78.8 87.47,80.07 JP47.3
N$303
  Top 0.152: IC24.10 88.73,80.07 88.23,80.57 88.23,81.84 87.47,82.61 JP47.2
N$304
  Top 0.152: IC24.9 88.73,81.34 88.73,83.88 87.47,85.15 JP47.1
N$305
  Top 0.254: IC25.1 96.86,57.59 98.13,56.32 JP49.4
N$306
  Top 0.254: IC25.2 96.86,58.86 97.88,58.86 JP49.3
N$307
  Top 0.254: IC25.3 96.86,60.38 97.88,60.38 JP49.2
N$308
  Top 0.254: IC25.4 96.86,61.65 98.13,62.92 JP49.1
N$309
  Top 0.254: IC25.5 88.73,61.65 87.47,62.92 JP50.4
N$310
  Top 0.254: IC25.6 88.73,60.38 87.72,60.38 JP50.3
N$311
  Top 0.254: IC25.7 88.73,58.86 87.72,58.86 JP50.2
N$312
  Top 0.254: IC25.8 88.73,57.59 87.47,56.32 JP50.1
N$313
  Top 0.254: IC26.1 96.86,45.52 98.13,44.25 JP51.4
N$314
  Top 0.254: IC26.2 96.86,46.79 97.88,46.79 JP51.3
N$315
  Top 0.254: IC26.3 96.86,48.32 97.88,48.32 JP51.2
N$316
  Top 0.254: IC26.4 96.86,49.59 98.13,50.86 JP51.1
N$317
  Top 0.254: IC26.5 88.73,49.59 87.47,50.86 JP52.4
N$318
  Top 0.254: IC26.6 88.73,48.32 87.72,48.32 JP52.3
N$319
  Top 0.254: IC26.7 88.73,46.79 87.72,46.79 JP52.2
N$320
  Top 0.254: IC26.8 88.73,45.52 87.47,44.25 JP52.1
N$321
  Top 0.254: IC27.1 96.86,33.46 98.13,32.19 JP53.4
N$322
  Top 0.254: IC27.2 96.86,34.73 97.88,34.73 JP53.3
N$323
  Top 0.254: IC27.3 96.86,36.25 97.88,36.25 JP53.2
N$324
  Top 0.254: IC27.4 96.86,37.52 98.13,38.79 JP53.1
N$325
  Top 0.254: IC27.5 88.73,37.52 87.47,38.79 JP54.4
N$326
  Top 0.254: IC27.6 88.73,36.25 87.72,36.25 JP54.3
N$327
  Top 0.254: IC27.7 88.73,34.73 87.72,34.73 JP54.2
N$328
  Top 0.254: IC27.8 88.73,33.46 87.47,32.19 JP54.1
N$329
  Top 0.152: IC28.1 96.86,13.77 96.86,11.23 98.13,9.96 JP56.8
N$330
  Top 0.152: IC28.3 96.86,16.31 98.13,15.04 JP56.6
N$331
  Top 0.152: IC28.2 96.86,15.04 97.37,14.53 97.37,13.26 98.13,12.5 JP56.7
N$332
  Top 0.152: IC28.4 96.86,17.58 98.13,17.58 JP56.5
N$333
  Top 0.152: IC28.5 96.86,19.11 98.13,19.11 JP56.4
N$334
  Top 0.152: IC28.6 96.86,20.38 98.13,21.65 JP56.3
N$335
  Top 0.152: IC28.7 96.86,21.65 97.37,22.15 97.37,23.42 98.13,24.19 JP56.2
N$336
  Top 0.152: IC28.8 96.86,22.92 96.86,25.46 98.13,26.73 JP56.1
N$337
  Top 0.152: IC28.16 88.73,13.77 88.73,11.23 87.47,9.96 JP55.8
N$338
  Top 0.152: IC28.15 88.73,15.04 88.23,14.53 88.23,13.26 87.47,12.5 JP55.7
N$339
  Top 0.152: IC28.14 88.73,16.31 87.47,15.04 JP55.6
N$340
  Top 0.152: IC28.13 88.73,17.58 87.47,17.58 JP55.5
N$341
  Top 0.152: IC28.12 88.73,19.11 87.47,19.11 JP55.4
N$342
  Top 0.152: IC28.11 88.73,20.38 87.47,21.65 JP55.3
N$343
  Top 0.152: IC28.10 88.73,21.65 88.23,22.15 88.23,23.42 87.47,24.19 JP55.2
N$344
  Top 0.152: IC28.9 88.73,22.92 88.73,25.46 87.47,26.73 JP55.1

## Text on the board
Top: RW | RW | RW